# Altium PCB test.PcbDoc
Units mil, origin at the board's own origin, x right, y up, seen from the top; angles counter-clockwise.
Board outline 6000 x 4000 mil, 2 copper layers (Top Layer, Bottom Layer); 6 components, 0 nets, 40 pads, 0 vias.
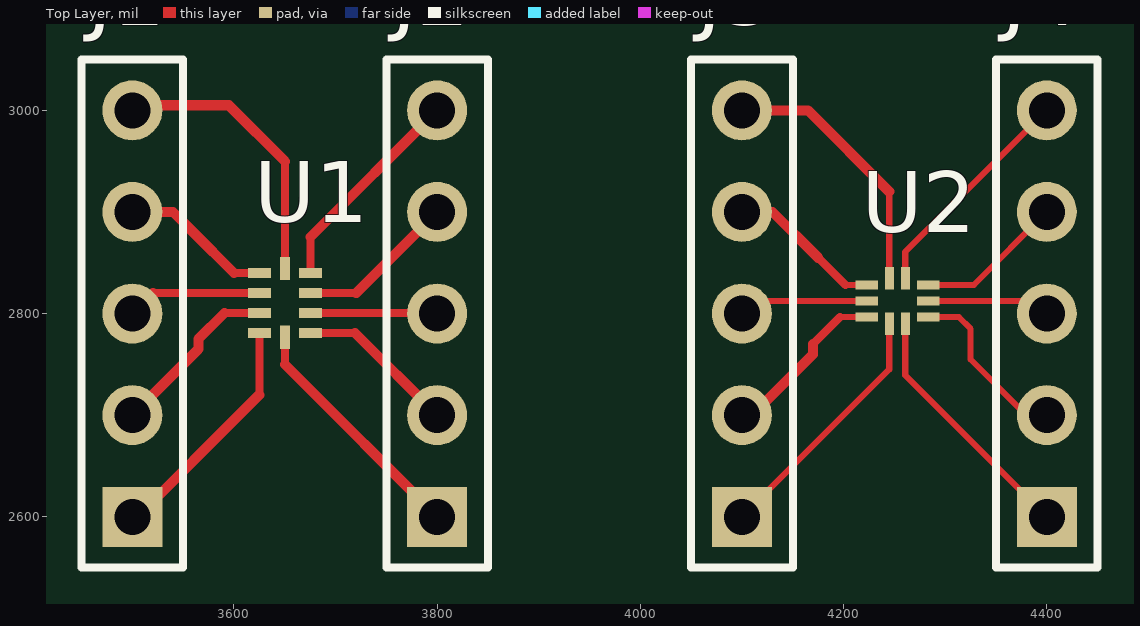
[diagram p0: Top Layer view]
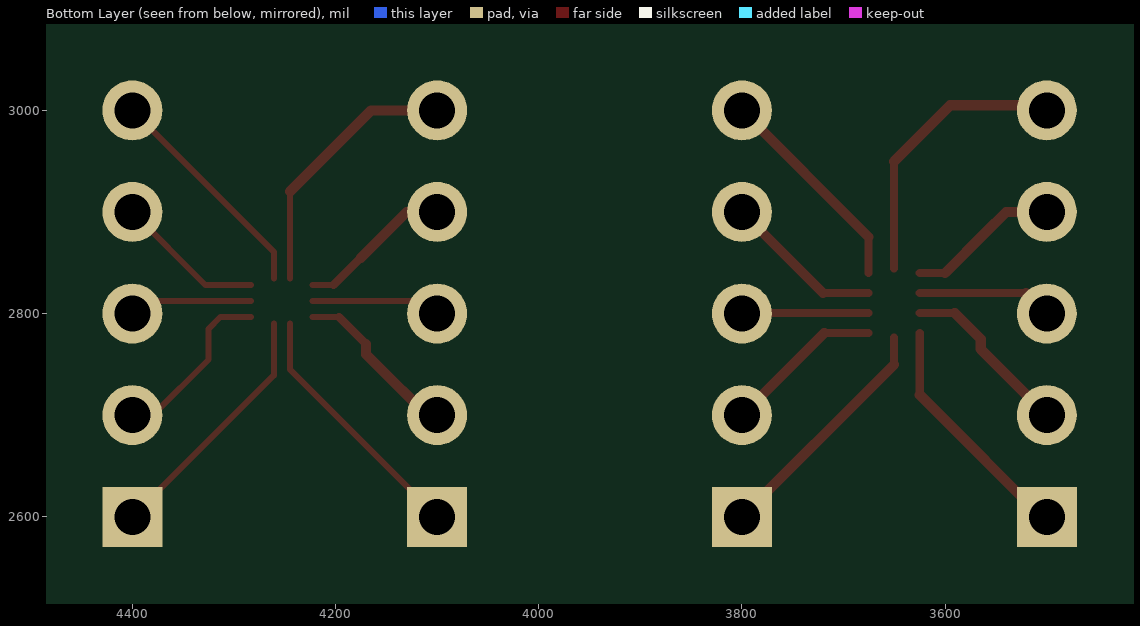
[diagram p1: Bottom Layer view, seen from below]

## Layer stack, top to bottom
Top Layer: signal copper 1.4
Dielectric: dielectric 12.6, FR-4, Dk 4.8
Bottom Layer: signal copper 1.4

## Board outline
1000,1000 7000,1000 7000,5000 1000,5000

## Design rules (kind name [scope] priority, off if disabled: settings)
Clearance [All] p1: gap=10
PolygonConnect [All] p1: connectstyle=Relief reliefconductorwidth=10 reliefentries=4 polygonreliefangle="90 Angle"
RoutingVias [All] p1: holewidth=28 width=50 viastyle="Through Hole" minholewidth=28 minwidth=50 maxholewidth=28 maxwidth=50
SilkscreenOverComponentPads [All] p1: minsilkscreentomaskgap=10
SolderMaskExpansion [All] p1: expansion=4
Width [All] p1: maxlimit=100 minlimit=6 preferedwidth=10
27 further rules are at their usual default settings.

## Components (designator, comment, footprint, x,y, rotation, side; value= is the part's Value field where it differs from the comment)
J1 "Comment" HDR1X5 3500,2600 r90 top
J2 "Comment" HDR1X5 3800,2600 r90 top
J3 "Comment" HDR1X5 4100,2600 r90 top
J4 "Comment" HDR1X5 4400,2600 r90 top
U1 "Comment" QFN10_TI_RUG 3625,2840 r0 top
U2 "Comment" WQFN10_ONSEMI 4245,2790 r90 top

## Footprints (in the part's own frame and the unit in brackets; to place one, negate y for a bottom-side part, rotate by r counter-clockwise, add the part's x,y. Pads: shape width x height; smd on the part's side, far side on the other; paste and mask are expansions set on the pad)
HDR1X5 [mm] "Connector; Header; 5 Position"
  rect 1.5x1.5 hole 0.9: 1(0,0)
  round 1.5 hole 0.9: 2(2.54,0) 3(5.08,0) 4(7.62,0) 5(10.16,0)
  silkscreen extent -1.27,-1.27 11.43,1.27
QFN10_TI_RUG [mm]
  rect 0.58x0.25 smd: 1(0,0) 2(0,-0.5) 3(0,-1) 4(0,-1.5) 6(1.28,-1.5) 7(1.28,-1) 8(1.28,-0.5) 9(1.28,0)
  rect 0.25x0.58 smd: 5(0.64,-1.61) 10(0.64,0.11)
WQFN10_ONSEMI [mm]
  rect 0.563x0.225 smd: 1(0,0) 2(0,-0.4) 6(1.137,-0.4) 7(1.137,0)
  rect 0.225x0.563 smd: 3(0.169,-0.968) 4(0.569,-0.968) 5(0.968,-0.968) 8(0.968,0.569) 9(0.569,0.569) 10(0.169,0.569)

## Part data
J1 J2 J3 J4: library part "Header 5"

## Nets (pads, with @x,y where several pads share a name; then routed paths per layer and width w, separated by ;. In a path a pad name is that pad's centre, name@x,y a point inside that pad or via, vN(x,y) a via of type N, cw(c..) or ccw(c..) an arc to the next point about the centre after c; other vN are vias at no path point)
pads on no net: J1.1 J1.2 J1.3 J1.4 J1.5 J2.1 J2.2 J2.3 J2.4 J2.5 J3.1 J3.2 J3.3 J3.4 J3.5 J4.1 J4.2 J4.3 J4.4 J4.5 U1.1 U1.2 U1.3 U1.4 U1.5 U1.6 U1.7 U1.8 U1.9 U1.10 U2.1 U2.2 U2.3 U2.4 U2.5 U2.6 U2.7 U2.8 U2.9 U2.10
copper on no net: | length 3789.5
  Top Layer w6: 4100,2600 4245,2745 4245,2790 ; 4112.38,2812.38 4222.62,2812.38 ; 4196.63,2796.63 4222.62,2796.63 ; 4201.87,2828.13 4222.62,2828.13 ; 4245,2834.76 4245,2920 ; 4260.75,2790 4260.75,2739.25 4400,2600 4410,2600 ; 4260.75,2834.76 4260.75,2860.75 4400,3000 ; 4283.13,2796.63 4313.37,2796.63 4325,2785 4325,2754.76 4379.76,2700 ; 4283.13,2812.38 4387.62,2812.38 4400,2800 ; 4283.13,2828.13 4328.13,2828.13 4400,2900 ; 4379.76,2700 4400,2700 4379.76,2700
  Top Layer w8: 3520.32,2820.32 3625,2820.32 ; 3590.63,2800.63 3625,2800.63 ; 3600,2840 3625,2840 ; 3625,2720 3625,2780.95 ; 3650.2,2749.8 3650.2,2776.61 ; 3650.2,2844.33 3650.2,2949.8 ; 3675.39,2780.95 3719.05,2780.95 ; 3675.39,2800.63 3799.37,2800.63 ; 3675.39,2820.32 3720.32,2820.32 ; 3675.39,2840 3675.39,2875.39 ; 4170,2770 4196.63,2796.63 ; 4175,2855 4201.87,2828.13
  Top Layer w10: 3495,2590 3625,2720 ; 3500,2700 3565,2765 3565,2775 3590.63,2800.63 ; 3500,2800 3520.32,2820.32 ; 3500,2900 3540,2900 3560,2880 3600,2840 ; 3500,3000 3505,3005 3595,3005 3650.2,2949.8 ; 3650.2,2749.8 3805,2595 ; 3675.39,2875.39 3800,3000 ; 3719.05,2780.95 3800,2700 ; 3720.32,2820.32 3800,2900 ; 3799.37,2800.63 3800,2800 ; 4100,2690 4170,2760 4170,2770 ; 4100,2800 4112.38,2812.38 ; 4100,2900 4130,2900 4175,2855 ; 4100,3000 4165,3000 4245,2920